# Altium PCB 16-Relay.PcbDoc
Units mm, origin at the board's own origin, x right, y up, seen from the top; angles counter-clockwise.
Board outline 40 x 40 mm, 4 copper layers (Top Layer, Internal Plane 1, Internal Plane 2, Bottom Layer), stack 0.462 mm thick; 24 components, 22 nets, 91 pads, 0 vias.
Unrouted connection lines stored in the file: 45.
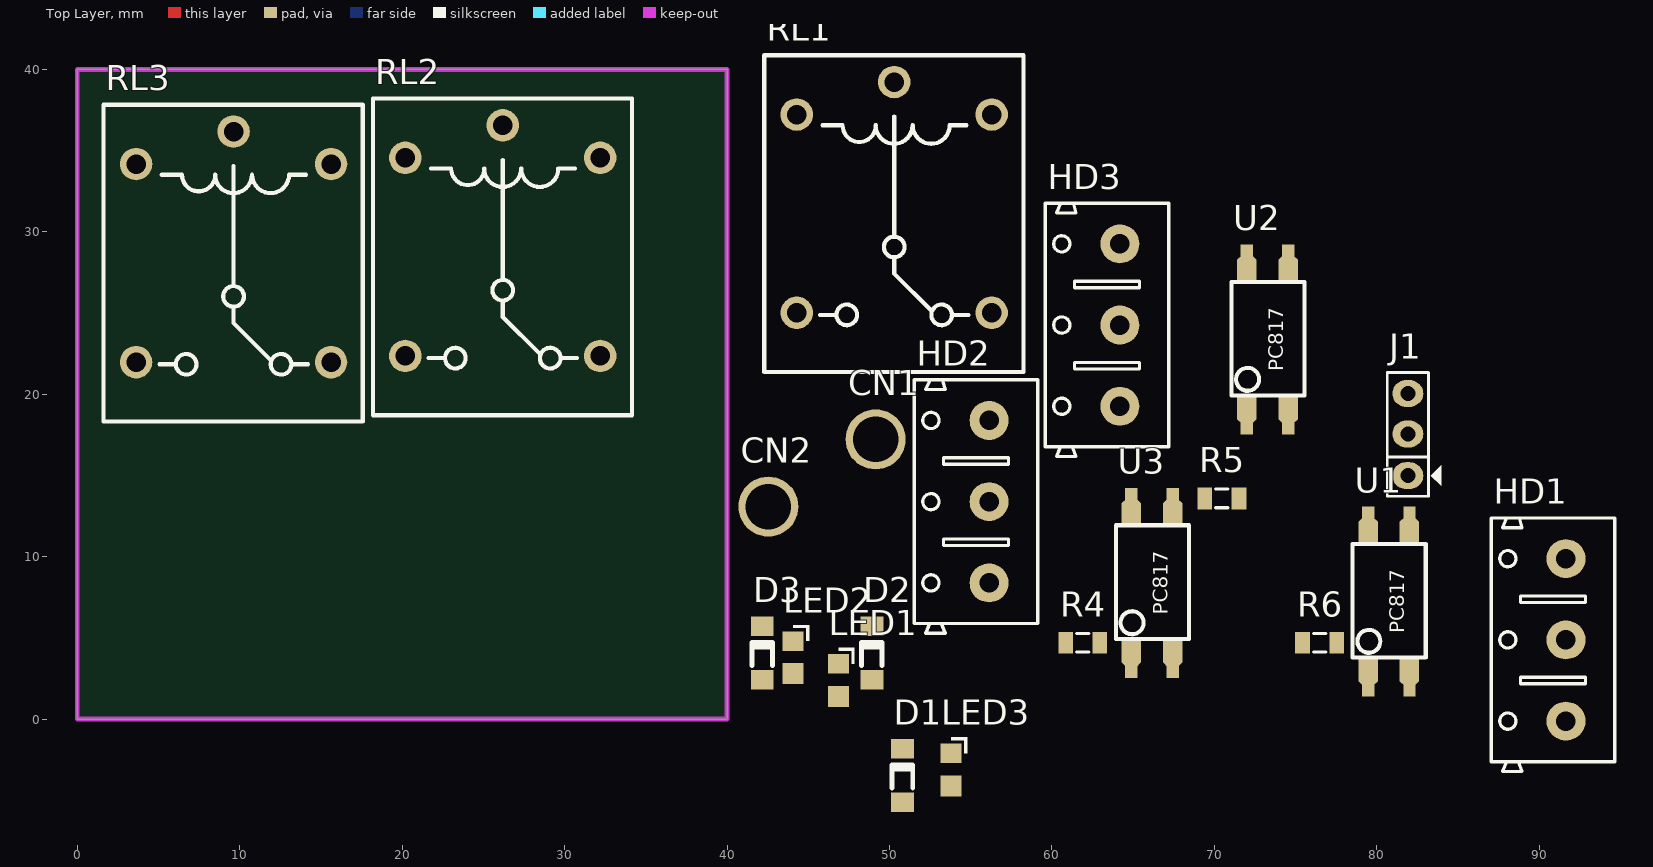
[diagram p0: Top Layer view]
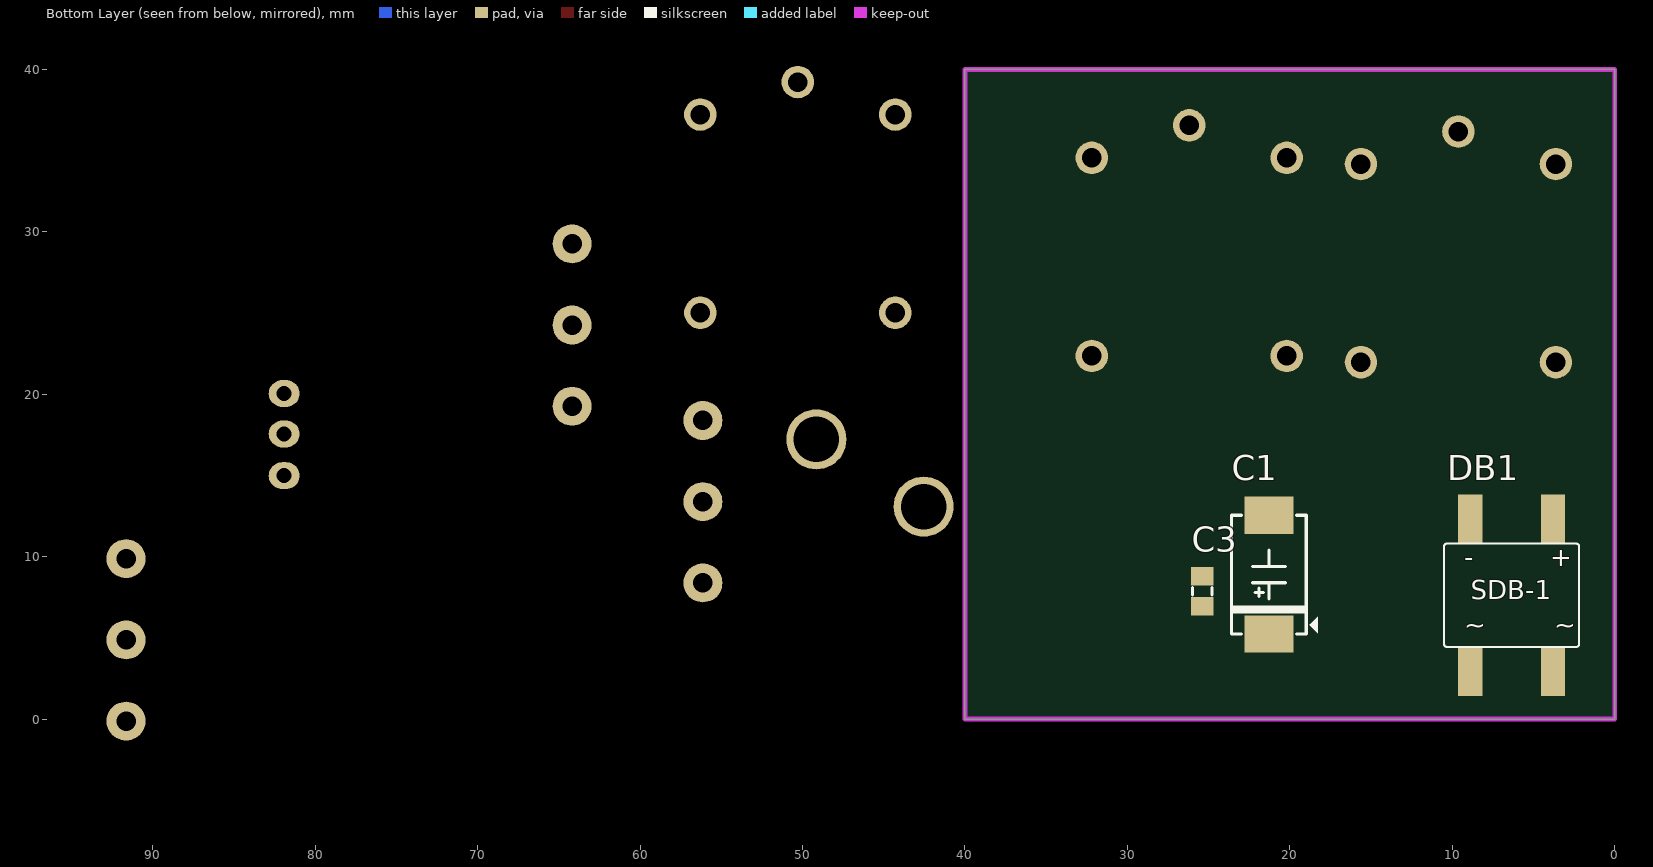
[diagram p1: Bottom Layer view, seen from below]
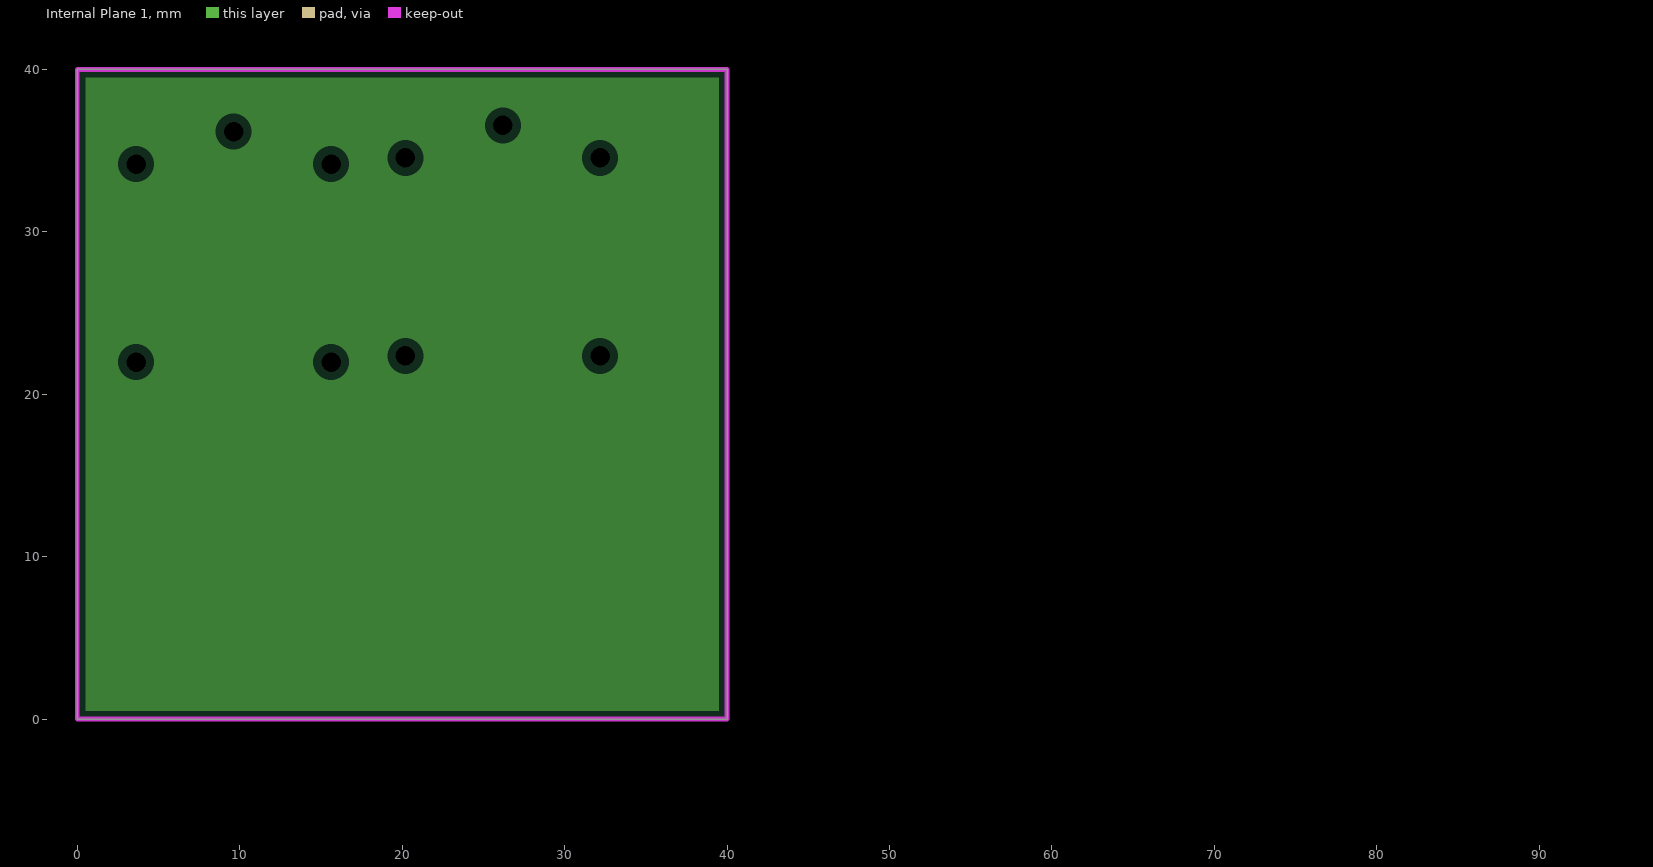
[diagram p2: Internal Plane 1, clearances drawn from the general rule]
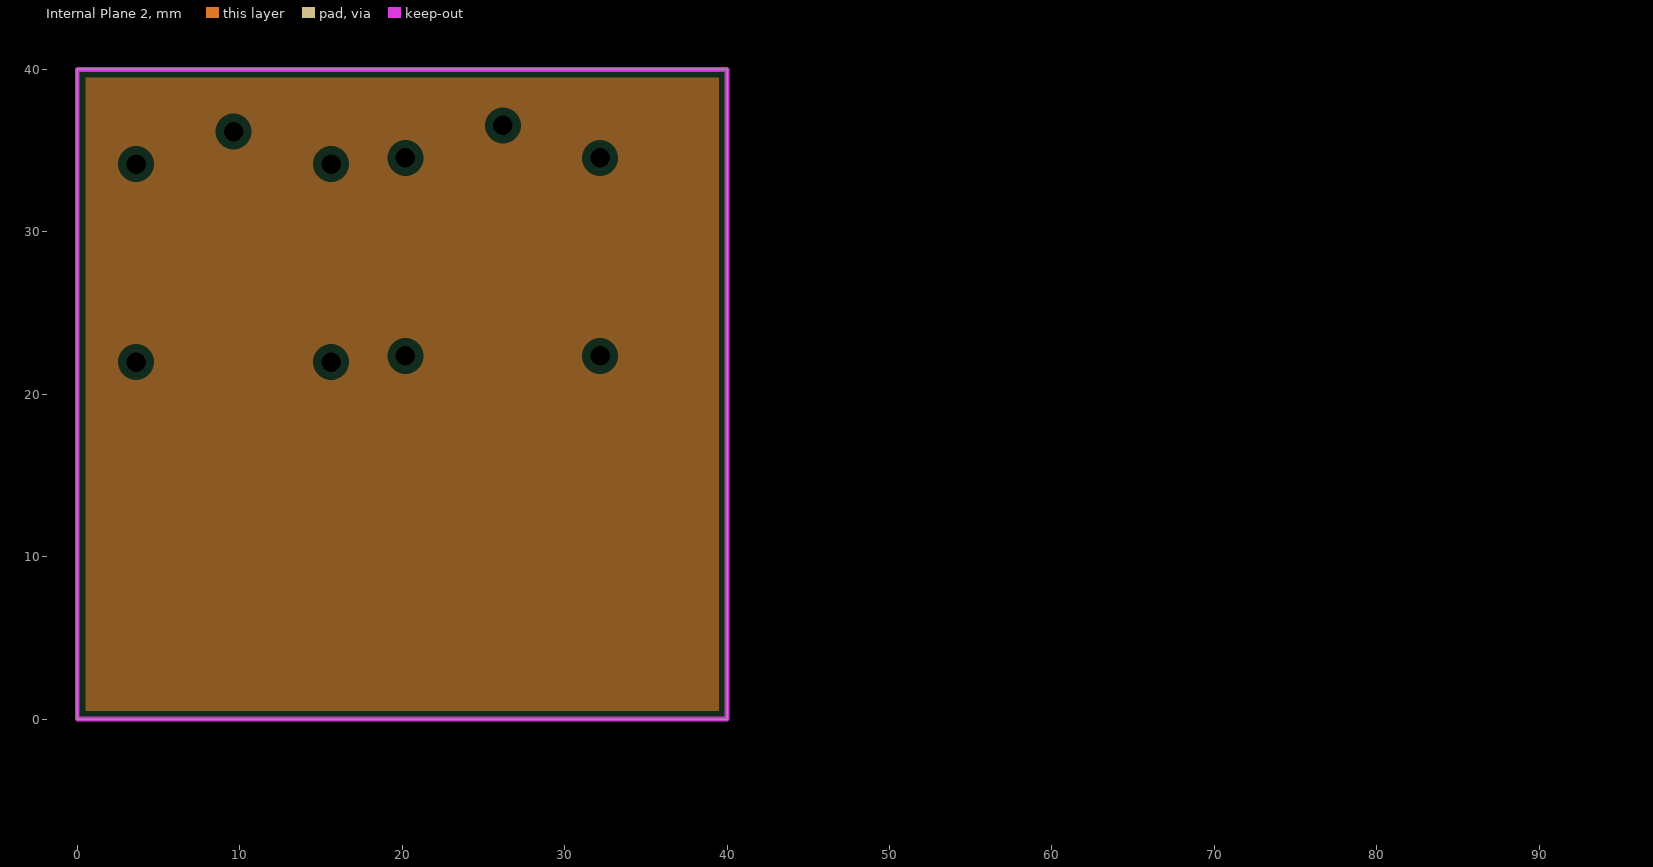
[diagram p3: Internal Plane 2, clearances drawn from the general rule]

## Layer stack, top to bottom
Top Solder: solder mask 0.0102, Solder Resist, Dk 3.5
Top Layer: signal copper 0.0356
Internal Plane 1: plane copper 0.0356
Internal Plane 2: plane copper 0.0356
Dielectric 1: dielectric 0.32, FR-4, Dk 4.8
Bottom Layer: signal copper 0.0356
Bottom Solder: solder mask 0.0102, Solder Resist, Dk 3.5

## Board outline
0,0 40,0 40,40 0,40

## Design rules (kind name [scope] priority, off if disabled: settings)
Clearance [All] p1: gap=0.2
PlaneClearance [All] p1: clearance=0.508
PlaneConnect [All] p1: planeconnectstyle=Relief reliefexpansion=0.508 reliefentries=4 reliefconductorwidth=0.254 reliefairgap=0.254
PolygonConnect [All] p1: connectstyle=Relief reliefconductorwidth=0.254 reliefentries=4 polygonreliefangle="90 Angle" airgapwidth=0.254
RoutingVias [All] p1: holewidth=0.6 width=1 viastyle="Through Hole" minholewidth=0.711 minwidth=1.27 maxholewidth=0.711 maxwidth=1.27
SolderMaskExpansion [All] p1: expansion=0.102
Width [All] p1: maxlimit=0.2 minlimit=0.2 preferedwidth=0.2
28 further rules are at their usual default settings.

## Components (designator, comment, footprint, x,y, rotation, side; value= is the part's Value field where it differs from the comment)
C1 "470uF" C-TANT-7343-31-CASEA 21.285,8.89 r90 bottom
C3 "104" C-0805 25.397,7.874 r270 bottom
CN1 "VIN1" M3 49.149,17.219 r0 top
CN2 "VIN2" M3 42.545,13.081 r0 top
D1 "1N4148" D-DO213-AA 50.8,-5.121 r90 top
D2 "1N4148" D-DO213-AA 48.919,2.413 r90 top
D3 "1N4148" D-DO213-AA 42.163,2.413 r90 top
DB1 "Diode Brideg" D-DB-1A-SMD 6.35,7.62 r180 bottom
HD1 "Header 3" TER-KF301-3 91.65,4.873 r90 top
HD2 "Header 3" TER-KF301-3 56.134,13.382 r90 top
HD3 "Header 3" TER-KF301-3 64.188,24.257 r90 top
J1 "Jumper 3" JP3 81.915,17.526 r90 top
LED1 "LED" LED-0805 46.863,2.397 r90 top
LED2 "LED" LED-0805 44.069,3.794 r90 top
LED3 "LED" LED-0805 53.792,-3.118 r90 top
R4 "220R" R-0805 61.906,4.699 r0 top
R5 "220R" R-0805 70.468,13.587 r0 top
R6 "220R" R-0805 76.483,4.699 r0 top
RL1 "Relay 10A/12V" RL-5P-10A 50.292,30.713 r0 top
RL2 "Relay 10A/12V" RL-5P-10A 26.193,28.052 r0 top
RL3 "Relay 10A/12V" RL-5P-10A 9.621,27.671 r0 top
U1 "PC817" PC817 82.015,2.286 r90 top
U2 "PC817" PC817 74.549,18.415 r90 top
U3 "PC817" PC817 67.437,3.429 r90 top

## Footprints (in the part's own frame and the unit in brackets; to place one, negate y for a bottom-side part, rotate by r counter-clockwise, add the part's x,y. Pads: shape width x height; smd on the part's side, far side on the other; paste and mask are expansions set on the pad)
C-0805 [mm] "Chip Capacitor, 2-Leads, Body 2.0x1.3mm, IPC Medium Density"
  rect 1.15x1.4 smd: 1(-0.925,0) 2(0.925,0)
  silkscreen extent -0.22,-0.6 0.23,0.6, body extent -1,-0.62 1,0.62, height 0.5
C-TANT-7343-31-CASEA [mm] "Tantalium Capacitor 7343-31"
  rect 2.3x3 smd: 1(-3.65,0) 2(3.65,0)
  silkscreen extent -3.65,-3 3.65,2.3, body extent -3.79,-2.3 3.81,2.3, height 3.1
D-DB-1A-SMD [mm] "DB106S"
  rect 1.5x3 smd: 1(-2.55,-4.713) 2(2.55,-4.713) 3(2.55,4.713) 4(-2.55,4.713)
  silkscreen extent -4.15,-3.18 4.15,3.18, body extent -4.15,-4.95 4.15,4.95, height 3.35
D-DO213-AA [mm]
  rect 1.2x1.4 smd: 1(0,0) 2(3.302,0)
  silkscreen extent 0.89,-0.63 2.29,0.64, body extent 0,-0.75 3.3,0.75, height 1.5
JP3 [mil] "Jumper 3"
  oval 65x75 hole 36: 1(-100,0) 2(1,0) 3(99,0)
  silkscreen extent -150,-81 150,50, body extent -150,-60 150,55, height 355
LED-0805 [mm]
  rect 1.3x1.3 smd: 1(-1,0)
  rect 1.2x1.3 smd: 2(1,0)
  silkscreen extent 1,-1 2,0, body extent -1.01,-0.63 1.01,0.62, height 1.1
M3 [mm]
  round 3.7 hole 2.8: 1(0,0)
PC817 [mil]
  rect 30x30 smd: 1(-20,100) 2(-20,0) 3(410,0) 4(410,100)
  oct 60x47.24 smd: 1(20,100) 2(20,0) 3(370,0) 4(370,100)
  rect 30x47.24 smd: 1(40,100) 2(40,0) 3(350,0) 4(350,100)
  silkscreen extent 59,-39 335,138, body extent 24,-39 362,141, height 148
R-0805 [mm] "Chip Resistor, 2-Leads, Body 2.0x1.3mm, IPC Medium Density"
  rect 0.9x1.35 smd: 1(-1.05,0) 2(1.05,0)
  silkscreen extent -0.38,-0.58 0.38,0.58, body extent -1,-0.63 1,0.63, height 0.5
RL-5P-10A [mm] "Relay Songle 5 pins 10A X19.1 Y15.5 Relay 5V 10A SRD-05VDC-SL-C"
  round 2 hole 1.2: 1(0,8.5) 2(6,-5.7) 3(-6,-5.7) 4(-6,6.5) 5(6,6.5)
  silkscreen extent -8,-9.35 7.95,10.15, body extent -7.75,-9.2 7.75,9.9, height 15.3
TER-KF301-3 [mm] "http://banlinhkien.vn/goods-987-con-2-kf301-2p-5-08mm-200mil.html"
  round 2.4 hole 1.2: 1(-5,0) 2(0,0) 3(5,0)
  silkscreen extent -8.1,-3 7.5,4.6, body extent -8.1,-3 7.5,4.6, height 10.1

## Part data
C1: library part CP1, "Cap P  0,1uF < 22uF , 16 - 50V"
C3: library part CN
CN1 CN2: library part COCDONGM3
D1 D2 D3: library part D1A, "Diode 1A"
DB1: library part DB, "Convert AC to DC voltage, 4 pin"
HD1 HD2 HD3: library part Hed3, "Header 3 (Green)"
J1: library part JP3
LED1 LED2 LED3: "LED Single colour Green and Red"
R4 R5 R6: library part R, "Resistor 1/4W"
RL1 RL2 RL3: library part "Relay 1", "Relay SPDT,10A - 12VDC 5 Pin"
U1 U2 U3: "Single Opto"

## Nets (pads, with @x,y where several pads share a name; then routed paths per layer and width w, separated by ;. In a path a pad name is that pad's centre, name@x,y a point inside that pad or via, vN(x,y) a via of type N, cw(c..) or ccw(c..) an arc to the next point about the centre after c; other vN are vias at no path point)
+12V: C1.1 C3.2 D1.2 D2.2 D3.2 DB1.3 RL1.5 RL2.5 RL3.5
GND: C1.2 C3.1 DB1.4 LED1.2 LED2.2 LED3.2 U1.2 U1.3 U2.2 U2.3 U3.2 U3.3
NetCN1_1: CN1.1 DB1.2
NetCN2_1: CN2.1 DB1.1
NetD1_1: D1.1 RL1.4 U1.4
NetD2_1: D2.1 RL2.4 U2.4
NetD3_1: D3.1 RL3.4 U3.4
NetHD1_1: HD1.1 RL1.2
NetHD1_2: HD1.2 RL1.1
NetHD1_3: HD1.3 RL1.3
NetHD2_1: HD2.1 RL2.2
NetHD2_2: HD2.2 RL2.1
NetHD2_3: HD2.3 RL2.3
NetHD3_1: HD3.1 RL3.2
NetHD3_2: HD3.2 RL3.1
NetHD3_3: HD3.3 RL3.3
NetLED1_1: LED1.1 R4.1
NetLED2_1: LED2.1 R5.1
NetLED3_1: LED3.1 R6.1
RL1: J1.3 R6.2 U1.1
RL2: J1.2 R5.2 U2.1
RL3: J1.1 R4.2 U3.1

## Keep-outs
Keep-Out Layer:
  the board outline again, w0.3

## Text inside footprints (layer, text, board x,y; h text height)
DB1: Bottom Overlay "~        ~" at 9.271,4.826 h2; Bottom Overlay "-         +" at 9.271,9.017 h2; Bottom Overlay "SDB-1" at 8.858,6.98 h2